# EAGLE board Spring2020V1.7 (EAGLE 9.5.1)
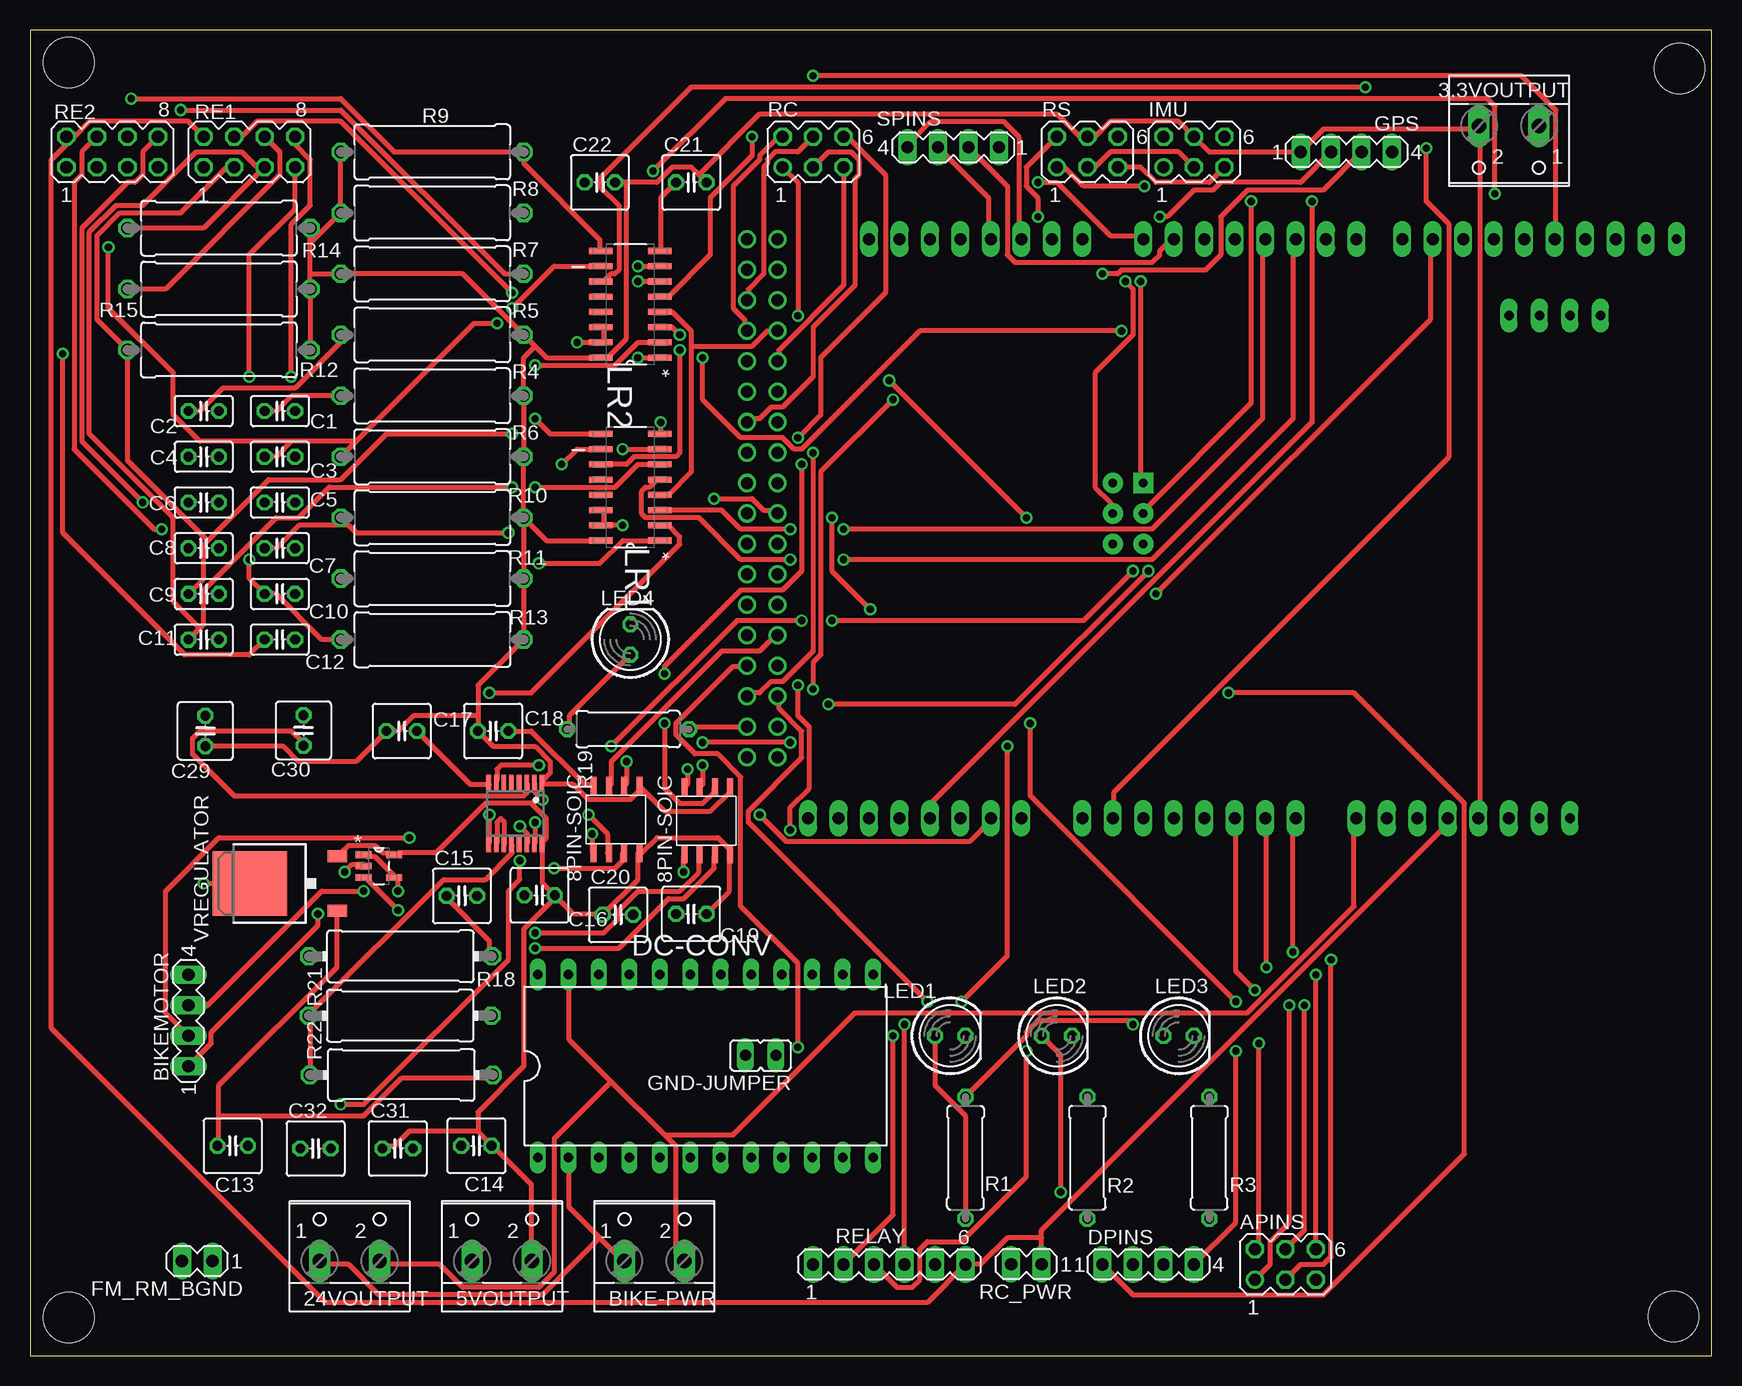
[diagram p0: board, top side]
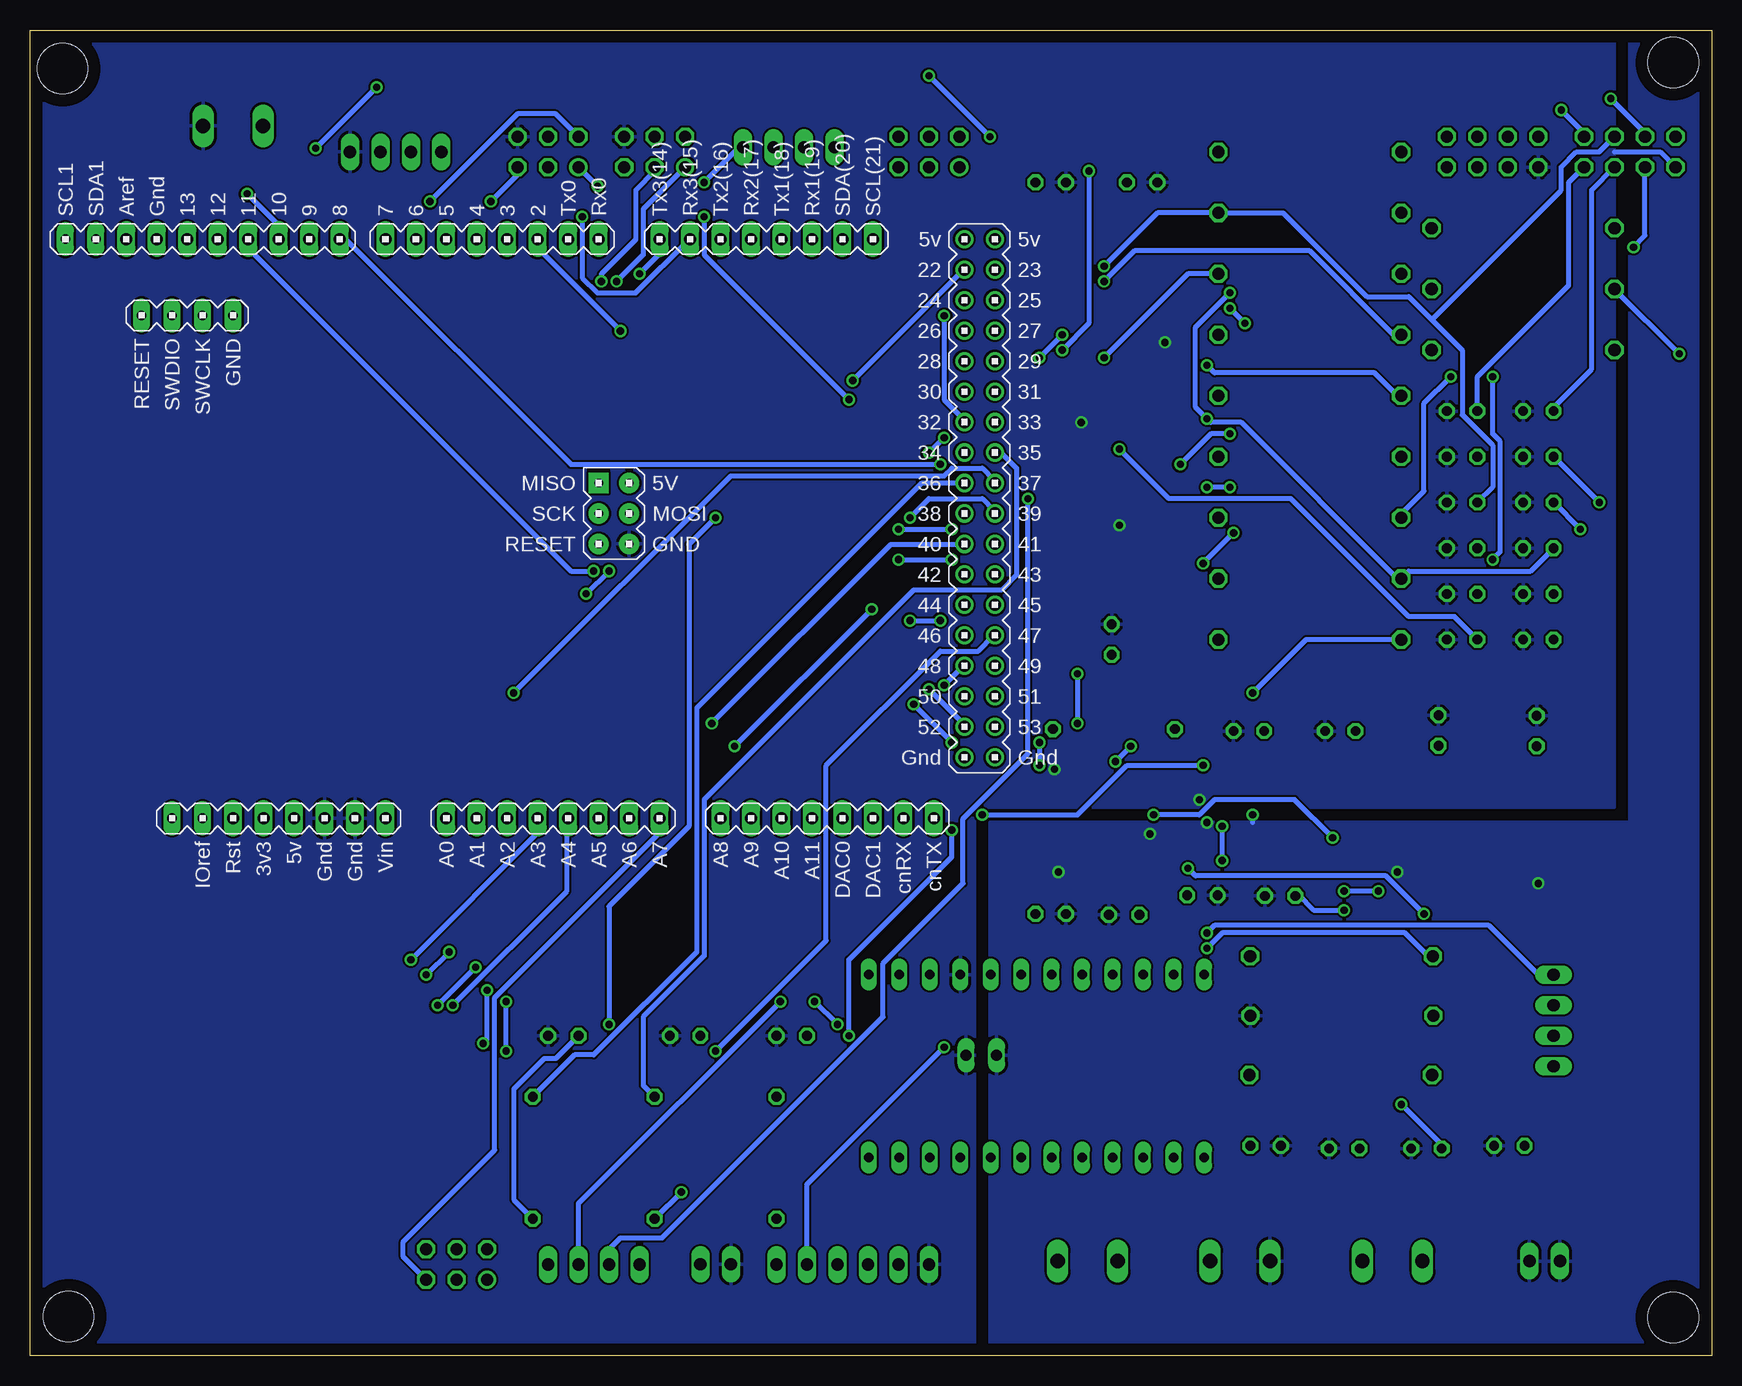
[diagram p1: board, bottom side, seen from below]

Size 140.21 x 110.49 mm. Coordinates in mm from the lower left corner, seen from the top.
Outline: 0,0 140.21,0 140.21,110.49 0,110.49 0,0
Copper layers (1*16): Top 0.035mm / dielectric 1.5mm / Bottom 0.035mm
Design rules "default *": minimum track width 10mil, minimum drill 0.6mm, track to track 7mil, track to pad 7mil, pad to pad 7mil, via to via 7mil, smd to smd 7mil, copper to edge 40mil, drill to drill 7mil, minimum pad ring 10mil, minimum via ring 8mil, stop-mask expansion 4mil, vias tented up to drill 0mil, thermal gap 10mil
Net classes: 0 default: width 0.406 mm
Holes 4.2 mm at 3.23,3.19 3.23,107.77 137.49,107.27 136.99,3.29

## Footprints (pad centres in the part's own frame; a part is rotated, then mirrored left to right if it is on the bottom)
W237-102 = drill 1.194 long: 1 -2.5,-1.27; 2 2.5,-1.27
MA03-2 = drill 1.016: 1 -2.54,-1.27 | drill 1.016 octagon: 2 -2.54,1.27; 3 0,-1.27; 4 0,1.27; 5 2.54,-1.27; 6 2.54,1.27
MA04-1 = drill 1.016 long: 1 -3.81,0; 2 -1.27,0; 3 1.27,0; 4 3.81,0
C025-025X050 = drill 0.813 octagon: 1 -1.27,0; 2 1.27,0
C025-050X050 = drill 0.813 octagon: 1 -1.27,0; 2 1.27,0
DIL24-6 = drill 0.813 long: 1 -13.97,-7.62; 2 -11.43,-7.62; 3 -8.89,-7.62; 4 -6.35,-7.62; 5 -3.81,-7.62; 6 -1.27,-7.62; 7 1.27,-7.62; 8 3.81,-7.62; 9 6.35,-7.62; 10 8.89,-7.62; 11 11.43,-7.62; 12 13.97,-7.62; 13 13.97,7.62; 14 11.43,7.62; 15 8.89,7.62; 16 6.35,7.62; 17 3.81,7.62; 18 1.27,7.62; 19 -1.27,7.62; 20 -3.81,7.62; 21 -6.35,7.62; 22 -8.89,7.62; 23 -11.43,7.62; 24 -13.97,7.62
MA02-1 = drill 1.016 long: 1 -2.54,0; 2 0,0
JP1 = drill 0.914 long: 1 0,-1.27; 2 0,1.27
LED5MM = drill 0.813 octagon: A -1.27,0; K 1.27,0
SOIC127P600X175-16N = smd 1.981 x 0.508: 1 -2.464,4.445; 2 -2.464,3.175; 3 -2.464,1.905; 4 -2.464,0.635; 5 -2.464,-0.635; 6 -2.464,-1.905; 7 -2.464,-3.175; 8 -2.464,-4.445; 9 2.464,-4.445; 10 2.464,-3.175; 11 2.464,-1.905; 12 2.464,-0.635; 13 2.464,0.635; 14 2.464,1.905; 15 2.464,3.175; 16 2.464,4.445
SOT95P280X145-5N = smd 1.321 x 0.559: 1 -1.27,0.94; 2 -1.27,0; 3 -1.27,-0.94; 4 1.27,-0.94; 5 1.27,0.94
0309/10 = drill 0.813 octagon: 1 -5.08,0; 2 5.08,0
P0613/15 = drill 1.016 octagon: 1 -7.62,0; 2 7.62,0
0414/15 = drill 1.016 octagon: 1 -7.62,0; 2 7.62,0
MA04-2 = drill 1.016 octagon: 1 -3.81,-1.27; 2 -3.81,1.27; 3 -1.27,-1.27; 4 -1.27,1.27; 5 1.27,-1.27; 6 1.27,1.27; 7 3.81,-1.27; 8 3.81,1.27
MA06-1 = drill 1.016 long: 1 -6.35,0; 2 -3.81,0; 3 -1.27,0; 4 1.27,0; 5 3.81,0; 6 6.35,0
DUE(NORMAL) = drill 1 long: 2 -16.51,30.48; 3 -19.05,30.48; 3V3 -39.37,-17.78; 4 -21.59,30.48; 5 -24.13,30.48; 5V -36.83,-17.78; 6 -26.67,30.48; 7 -29.21,30.48; 8 -33.02,30.48; 9 -35.56,30.48; 10 -38.1,30.48; 11 -40.64,30.48; 12 -43.18,30.48; 13 -45.72,30.48; A0 -24.13,-17.78; A1 -21.59,-17.78; A2 -19.05,-17.78; A3 -16.51,-17.78; A4 -13.97,-17.78; A5 -11.43,-17.78; A6 -8.89,-17.78; A7 -6.35,-17.78; A8 -1.27,-17.78; A9 1.27,-17.78; A10 3.81,-17.78; A11 6.35,-17.78; AREF -50.8,30.48; AREF1 -50.8,30.48; CANRX 13.97,-17.78; CANTX 16.51,-17.78; DAC0 8.89,-17.78; DAC1 11.43,-17.78; GND1 -48.26,30.48; GND_1 -34.29,-17.78; GND_2 -31.75,-17.78; RESET -41.91,-17.78; RX0 -11.43,30.48; RX1 6.35,30.48; RX2 1.27,30.48; RX3 -3.81,30.48; SCL 11.43,30.48; SDA 8.89,30.48; TX0 -13.97,30.48; TX1 3.81,30.48; TX2 -1.27,30.48; TX3 -6.35,30.48; VIN -29.21,-17.78 | drill 1: 5V_A 19.05,30.48; 5V_B 21.59,30.48; 22 19.05,27.94; 23 21.59,27.94; 24 19.05,25.4; 25 21.59,25.4; 26 19.05,22.86; 27 21.59,22.86; 28 19.05,20.32; 29 21.59,20.32; 30 19.05,17.78; 31 21.59,17.78; 32 19.05,15.24; 33 21.59,15.24; 34 19.05,12.7; 35 21.59,12.7; 36 19.05,10.16; 37 21.59,10.16; 38 19.05,7.62; 39 21.59,7.62; 40 19.05,5.08; 41 21.59,5.08; 42 19.05,2.54; 43 21.59,2.54; 44 19.05,0; 45 21.59,0; 46 19.05,-2.54; 47 21.59,-2.54; 48 19.05,-5.08; 49 21.59,-5.08; 50 19.05,-7.62; 51 21.59,-7.62; 52 19.05,-10.16; 53 21.59,-10.16; GND_A 19.05,-12.7; GND_B 21.59,-12.7 | drill 0.7 pad 1.676: 5V_ICSP -8.89,5.08; GND_ICSP -8.89,10.16; MOSI_ICSP -8.89,7.62; RESET_ICSP -11.43,5.08; SCK_ICSP -11.43,7.62 | drill 0.8 pad 1.422 long: GND_DEBUG -41.91,24.13; IOREF -44.45,-17.78; NC -46.99,-17.78; RESET_DEBUG -49.53,24.13; SCL1 -55.88,30.48; SDA1 -53.34,30.48; SWCLK_DEBUG -44.45,24.13; SWDIO_DEBUG -46.99,24.13 | drill 0.7 pad 1.676 square: MISO_ICSP -11.43,10.16
8PINSOIC = smd 1.524 x 0.508: 1 -2.794,2.286; 2 -2.794,1.016; 3 -2.794,-0.254; 4 -2.794,-1.524; 5 2.794,-1.524; 6 2.794,-0.254; 7 2.794,1.016; 8 2.794,2.286
QSOP16 = smd 0.381 x 1.27: 1 -2.223,-2.6; 2 -1.587,-2.6; 3 -0.953,-2.6; 4 -0.318,-2.6; 5 0.318,-2.6; 6 0.953,-2.6; 7 1.587,-2.6; 8 2.223,-2.6; 9 2.223,2.6; 10 1.587,2.6; 11 0.953,2.6; 12 0.318,2.6; 13 -0.318,2.6; 14 -0.953,2.6; 15 -1.587,2.6; 16 -2.223,2.6
TO252 = smd 1 x 1.6: 1 -2.28,-4.8; 2 2.28,-4.8 | smd 5.4 x 6.2: 3 0,2.5

## Placement (x,y rotation side)
3.3VOUTPUT  [W237-102]  123.29,101.23 180 top
5VOUTPUT  [W237-102]  39.34,9.17 0 top
24VOUTPUT  [W237-102]  26.64,9.17 0 top
APINS  [MA03-2]  104.65,7.62 0 top
BIKE-PWR  [W237-102]  52.04,9.17 0 top
BIKEMOTOR  [MA04-1]  13.21,27.94 90 top
C1  [C025-025X050]  20.83,78.74 0 top
C2  [C025-025X050]  14.48,78.74 0 top
C3  [C025-025X050]  20.83,74.93 0 top
C4  [C025-025X050]  14.48,74.93 0 top
C5  [C025-025X050]  20.83,71.12 0 top
C6  [C025-025X050]  14.48,71.12 0 top
C7  [C025-025X050]  20.83,67.31 0 top
C8  [C025-025X050]  14.48,67.31 0 top
C9  [C025-025X050]  14.48,63.5 0 top
C10  [C025-025X050]  20.83,63.5 0 top
C11  [C025-025X050]  14.48,59.69 0 top
C12  [C025-025X050]  20.83,59.69 0 top
C13  [C025-050X050]  16.89,17.5 0 top
C14  [C025-050X050]  37.21,17.5 180 top
C15  [C025-050X050]  36,38.33 0 top
C16  [C025-050X050]  42.48,38.38 180 top
C17  [C025-050X050]  30.99,52.07 0 top
C18  [C025-050X050]  38.61,52.07 0 top
C19  [C025-050X050]  55.12,36.83 180 top
C20  [C025-050X050]  49.01,36.76 0 top
C21  [C025-050X050]  55.12,97.79 0 top
C22  [C025-050X050]  47.5,97.79 0 top
C29  [C025-050X050]  14.62,52.08 90 top
C30  [C025-050X050]  22.8,52.12 90 top
C31  [C025-050X050]  30.65,17.28 0 top
C32  [C025-050X050]  23.8,17.28 0 top
DC-CONV  [DIL24-6]  56.31,24.16 0 top
DPINS  [MA04-1]  93.22,7.62 0 top
FM_RM_BGND  MA02-1  [MA02-1]  12.67,7.9 180 top
GND-JUMPER  [JP1]  60.91,25.05 90 top
GPS  [MA04-1]  109.73,100.33 0 top
IMU  [MA03-2]  97.03,100.33 0 top
LED1  [LED5MM]  76.71,26.67 0 top
LED2  [LED5MM]  85.6,26.67 0 top
LED3  [LED5MM]  95.76,26.67 0 top
LED4  [LED5MM]  50.04,59.69 90 top
LR1  ST26C32ABDR  [SOIC127P600X175-16N]  50.04,72.39 180 top
LR2  ST26C32ABDR  [SOIC127P600X175-16N]  50.04,87.63 180 top
OP-AMP  OPAMP  [SOT95P280X145-5N]  29.09,40.81 0 top
R1  [0309/10]  77.98,16.51 270 top
R2  [0309/10]  88.14,16.51 270 top
R3  [0309/10]  98.3,16.51 270 top
R4  [P0613/15]  33.53,80.01 0 top
R5  [P0613/15]  33.53,85.09 0 top
R6  [P0613/15]  33.53,74.93 0 top
R7  [P0613/15]  33.53,90.17 0 top
R8  [P0613/15]  33.53,95.25 0 top
R9  [P0613/15]  33.53,100.33 0 top
R10  [P0613/15]  33.53,69.85 180 top
R11  [P0613/15]  33.53,64.77 180 top
R12  [P0613/15]  15.75,83.82 180 top
R13  [P0613/15]  33.53,59.69 180 top
R14  [P0613/15]  15.75,93.98 180 top
R15  [P0613/15]  15.75,88.9 180 top
R18  [0414/15]  30.88,33.3 0 top
R19  [0309/10]  49.86,52.23 180 top
R21  [0414/15]  30.85,28.35 180 top
R22  [0414/15]  30.95,23.41 0 top
RC  [MA03-2]  65.28,100.33 0 top
RC_PWR  MA02-1  [MA02-1]  81.79,7.64 180 top
RE1  [MA04-2]  18.29,100.33 0 top
RE2  [MA04-2]  6.86,100.33 0 top
RELAY  [MA06-1]  71.63,7.62 0 top
RS  [MA03-2]  88.14,100.33 0 top
SPINS  [MA04-1]  76.96,100.71 180 top
U$1  DUE(NORMAL)  [DUE(NORMAL)]  81.37,62.58 0 bottom
U$2  IL-711  [8PINSOIC]  48.51,44.7 270 top
U$5  ISOLATED_ERROR_AMP_ADUM3190  [QSOP16]  40.45,45.21 180 top
U$7  IL-712  [8PINSOIC]  56.07,44.59 270 top
VREGULATOR  7818DT  [TO252]  20.83,39.37 90 top

## Library data of the parts
3.3VOUTPUT 5VOUTPUT 24VOUTPUT BIKE-PWR = con-wago-500; MPN: 237-102; OC_FARNELL: unknown; OC_NEWARK: 70K9898
APINS BIKEMOTOR DPINS GPS IMU RC RE1 RE2 RELAY RS SPINS = con-lstb
C1-C22 C29-C32 R4-R15 R18 R21 R22 = resistor
DC-CONV = Spring2016DC_DC_Conv
FM_RM_BGND RC_PWR = divers
GND-JUMPER = jumper
LED1-LED4 = led
LR1 LR2 = BikeTeamLR; MPN: ST26C32ABDR; OC_FARNELL: -; OC_NEWARK: 89K0998; PACKAGE: SOIC-16; SUPPLIER: STMICROELECTRONICS
OP-AMP = Spring2016opamp
R1-R3 R19 = rcl
U$1 = DUElib130425
U$2 U$7 = Spring2016Optoisolator
U$5 = Spring2016IsolatedErrorAmp
VREGULATOR = linear

## Nets
1AIN1: C7.1 LR1.1 R10.2 RE1.8
1AIN2: C10.1 LR1.2 R13.2 RE1.7
1AOUT: LR1.3 U$1.4
1BIN1: C12.1 LR1.7 R15.2 RE1.6
1BIN2: C11.1 LR1.6 R14.2 RE1.5
1BOUT: LR1.5 U$1.5
1CIN1: C8.1 LR1.9 R11.2 RE1.4
1CIN2: C9.1 LR1.10 R12.2 RE1.3
1COUT: LR1.11 U$1.10
2AIN1: C4.1 LR2.1 R7.2 RE2.8
2AIN2: C1.1 LR2.2 R4.1 RE2.7
2AOUT: LR2.3 U$1.2
2BIN1: C5.1 LR2.7 R8.2 RE2.6
2BIN2: C2.1 LR2.6 R5.1 RE2.5
2BOUT: LR2.5 U$1.13
2CIN1: C6.1 LR2.9 R9.2 RE2.4
2CIN2: C3.1 LR2.10 R6.1 RE2.3
2COUT: LR2.11 U$1.A6
3.3V: 3.3VOUTPUT.2 C17.1 C18.1 C21.2 C22.2 C29.1 GPS.1 IMU.4 LR1.16 LR2.16 R4.2 R5.2 R6.2 R7.1 R8.1 R9.1 R10.1 R11.1 R12.1 R13.1 R14.1 R15.1 RS.4 U$1.3V3 U$2.1 U$5.1 U$7.1
5V: RC_PWR.1 RE1.2 RE2.2 RELAY.6 U$1.5V
22: R1.1 U$1.22
24GND: 24VOUTPUT.1 BIKE-PWR.1 DC-CONV.2
29: U$1.29
35: R2.1 U$1.35
36: R3.1 U$1.36
37: DPINS.1 U$1.37
38: DPINS.2 U$1.38
39: DPINS.3 U$1.39
40: DPINS.4 U$1.40
47: RELAY.3 U$1.47
48: RELAY.2 U$1.48
49: RELAY.5 U$1.49
50: RELAY.4 U$1.50
53: R19.1 U$1.53
A0: APINS.6 U$1.A0
A1: APINS.4 U$1.A1
A2: APINS.2 U$1.A2
A3: APINS.3 U$1.A3
A4: APINS.1 U$1.A4
A7: APINS.5 U$1.A7
BAT+: C13.1 R22.2 VREGULATOR.1
BGND: 5VOUTPUT.1 C13.2 C14.2 C15.2 C16.2 C19.2 C20.2 C31.2 C32.2 FM_RM_BGND.1 FM_RM_BGND.2 GND-JUMPER.2 OP-AMP.2 R21.1 U$2.5 U$5.9 U$5.15 U$7.5 VREGULATOR.3
BIKE-IN: 24VOUTPUT.2 BIKE-PWR.2 DC-CONV.23 U$1.VIN
BRAKE: RC.5 U$1.28
CH1: RC.6 U$1.51
CH2: RC.4 U$1.25
CURRENT_SENSE: U$1.A8
EAOUT: U$1.A9 U$5.7
FRONT-DIGI: U$1.46 U$2.3
FRONT-DIGIOUT: BIKEMOTOR.2 U$2.6
FRONT-PWM: U$1.9 U$2.2
FRONT-PWMOUT/SERVO1: BIKEMOTOR.1 U$2.7
GND: 3.3VOUTPUT.1 C1.2 C2.2 C3.2 C4.2 C5.2 C6.2 C7.2 C8.2 C9.2 C10.2 C11.2 C12.2 C17.2 C18.2 C21.1 C22.1 C29.2 C30.2 DC-CONV.16 GND-JUMPER.1 GPS.4 IMU.6 LED1.K LED2.K LED3.K LED4.K LR1.8 LR1.14 LR1.15 LR2.8 LR2.14 LR2.15 RC_PWR.2 RE1.1 RE2.1 RELAY.1 RS.6 U$1.5V_ICSP U$1.GND_1 U$1.GND_2 U$2.4 U$5.2 U$5.8 U$7.4
HORN: RC.1 U$1.32
IMU-CS: IMU.2 U$1.A11
LR-EN: LR1.4 LR2.4 U$1.26
MISO: IMU.3 RS.3 U$1.MISO_ICSP
MOSI: IMU.1 RS.1 U$1.MOSI_ICSP
N$1: LED1.A R1.2
N$2: LED2.A R2.2
N$3: LED3.A R3.2
N$6: LED4.A R19.2
N$7: C32.1 U$5.14
N$9: U$5.10 U$5.11
N$10: R21.2 R22.1 U$5.12
N$11: C30.1 U$5.3
PANIC: RC.2 U$1.27
REAR-PWM: U$1.8 U$7.2
REAR-PWM-FINAL: BIKEMOTOR.3 OP-AMP.1 OP-AMP.4
REAR-PWMOUT: C15.1 OP-AMP.3 R18.2
REAR-PWMR/SERVO2: R18.1 U$7.7
REAR-TIMER: BIKEMOTOR.4 U$7.6
REAR-TIMER-IN: U$1.11 U$7.3
REG5V: 5VOUTPUT.2 C14.1 C16.1 C19.1 C20.1 C31.1 OP-AMP.5 U$2.8 U$5.16 U$7.8 VREGULATOR.2
REV: RC.3 U$1.33
RS-CS: RS.2 U$1.52
RX0: SPINS.1 U$1.RX0
RX2: SPINS.3 U$1.RX2
RX3: GPS.2 U$1.RX3
SCK: IMU.5 RS.5 U$1.SCK_ICSP
TX0: SPINS.2 U$1.TX0
TX2: SPINS.4 U$1.TX2
TX3: GPS.3 U$1.TX3

## Tracks (layer width: path | path; a pad name or v marks a point on that pad's centre or on a via)
1AIN1  (via drill 0.6)
  Top 0.406: LR1.1 49.4,67.94 47.5,66.04 v42.42,66.04 | v39.88,68.58 27.18,68.58 26.54,69.22 | R10.2 26.54,69.22 | C7.1 20.51,67.31 22.42,69.22 26.54,69.22 | RE1.8 22.1,100.96 23.37,99.69 23.37,95.88 21.78,94.3 v21.78,81.6
  Bottom 0.406: v39.88,68.58 v42.42,66.04 | v21.78,81.6 24,79.38 24,72.07 25.91,70.17 R10.2
1AIN2  (via drill 0.6)
  Top 0.406: LR1.2 53.21,69.22 54.17,68.26 54.17,67.63 41.78,55.25 v38.29,55.25 | R13.2 24.32,59.69 20.51,63.5 C10.1 18.29,64.77 v18.29,66.36 | RE1.7 22.1,95.57 18.29,91.76 v18.29,81.6
  Bottom 0.406: v38.29,55.25 33.85,59.69 R13.2 | v18.29,81.6 18.29,76.83 17.65,76.2 17.65,66.99 v18.29,66.36
1AOUT  (via drill 0.6)
  Top 0.406: LR1.3 57.66,70.48 59.25,68.9 v63.37,68.9 | v67.82,68.9 93.53,68.9 102.74,78.1 102.74,93.03 U$1.4
  Bottom 0.406: v67.82,68.9 v63.37,68.9
1BIN1  (via drill 0.6)
  Top 0.406: R15.2 11.3,88.9 20.83,98.42 20.83,100.33 RE1.6 | v49.4,75.56 LR1.7 | v2.73,83.5 2.73,68.58 12.89,58.42 18.29,58.42 C12.1
  Bottom 0.406: v49.4,75.56 45.28,71.44 35.12,71.44 25.27,61.59 21.46,61.59 C12.1 | v2.73,83.5 R15.2
1BIN2  (via drill 0.6)
  Top 0.406: R14.2 14.48,93.98 19.24,98.74 | LR1.6 50.67,74.29 48.77,72.39 v42.1,72.39 | v40.2,72.39 24.96,72.39 22.42,69.85 20.51,69.85 14.48,63.82 14.48,60.96 14.16,60.64 | C11.1 14.16,60.64 | 19.24,98.74 17.65,100.33 13.84,100.33 9.4,95.88 7.18,95.88 4.95,93.66 4.95,76.83 11.94,69.85 11.94,62.87 14.16,60.64 | 19.24,98.74 RE1.5
  Bottom 0.406: v40.2,72.39 v42.1,72.39
1BOUT  (via drill 0.6)
  Top 0.406: v63.37,66.36 59.25,66.36 55.75,69.85 51.31,69.85 50.99,70.17 50.99,72.07 51.31,72.39 51.62,72.39 52.26,73.02 LR1.5 | v67.82,66.36 93.53,66.36 105.28,78.1 105.28,93.03 U$1.5
  Bottom 0.406: v67.82,66.36 v63.37,66.36
1CIN1  (via drill 0.6)
  Top 0.406: LR1.9 43.37,76.83 v42.1,78.1 | RE1.4 17.65,101.6 18.92,102.87 25.91,102.87 v40.2,88.58
  Bottom 0.406: C8.1 15.11,65.41 25.27,65.41 R11.2 26.23,64.77 39.24,77.79 41.78,77.79 v42.1,78.1 43.05,79.06 43.05,85.72 v40.2,88.58
1CIN2  (via drill 0.6)
  Top 0.406: LR1.10 45.59,75.56 v44.32,74.29 | v40.2,76.83 29.72,76.83 25.91,73.02 19.88,73.02 14.8,67.94 | 14.8,67.94 14.48,67.63 14.48,64.77 C9.1 | 14.8,67.94 8.13,74.61 R12.2 5.59,86.36 5.59,93.34 7.49,95.25 12.57,95.25 16.38,99.06 RE1.3
  Bottom 0.406: v44.32,74.29 41.78,76.83 v40.2,76.83
1COUT  (via drill 0.6)
  Top 0.406: LR1.11 49.72,74.29 50.36,74.93 53.85,74.93 54.17,75.25 v54.17,83.82 | v51.94,98.74 57.98,104.77 121.47,104.77 122.11,104.14 v122.11,96.84
  Bottom 0.406: v54.17,83.82 51.94,86.04 v51.94,98.74 | v122.11,96.84 119.57,94.3 119.57,93.34 U$1.10
2AIN1  (via drill 0.6)
  Top 0.406: v50.67,83.18 LR2.1 | v9.4,71.12 4.32,76.2 4.32,93.98 8.13,97.79 8.76,97.79 9.4,98.42 9.4,100.33 RE2.8 | R7.2 39.56,90.17 25.91,103.82 v12.57,103.82
  Bottom 0.406: v50.67,83.18 43.69,90.17 R7.2 | v9.4,71.12 C4.1 | v12.57,103.82 10.67,101.92 RE2.8
2AIN2  (via drill 0.6)
  Top 0.406: LR2.2 50.67,84.45 48.77,82.55 v42.1,82.55 | C1.1 20.51,78.74 21.78,80.01 R4.1
  Bottom 0.406: v42.1,82.55 41.47,81.91 28.13,81.91 26.23,80.01 R4.1 | RE2.7 11.94,97.79 11.94,89.22 19.56,81.6 C1.1
2AOUT  (via drill 0.6)
  Top 0.406: LR2.3 53.53,85.72 v54.17,85.09 | v56.07,83.18 56.07,79.69 59.25,76.52 62.74,76.52 63.69,75.56 64.32,75.56 74.17,85.41 v91,85.41
  Bottom 0.406: v56.07,83.18 v54.17,85.09 | v91,85.41 97.66,92.07 97.66,93.03 U$1.2
2BIN1  (via drill 0.6)
  Top 0.406: v50.67,90.8 LR2.7
  Bottom 0.406: v50.67,90.8 46.23,95.25 R8.2 35.75,95.25 28.77,88.27 25.27,88.27 23.37,86.36 | C5.1 18.29,72.39 18.29,75.88 20.83,78.42 20.83,83.82 23.37,86.36 | RE2.6 9.4,100.33 11.3,100.33 12.57,99.06 12.57,97.16 23.37,86.36
2BIN2  (via drill 0.6)
  Top 0.406: v50.67,89.53 LR2.6 | C2.1 14.16,78.74 16.07,80.64 22.1,80.64 25.91,84.45 R5.1
  Bottom 0.406: v50.67,89.53 48.13,92.07 33.53,92.07 26.54,85.09 R5.1 | RE2.5 10.03,97.16 10.03,82.23 13.21,79.06 C2.1
2BOUT  (via drill 0.6)
  Top 0.406: LR2.5 53.21,88.27 56.71,91.76 56.71,96.52 60.2,100.01 v60.2,101.6 | v65.28,106.68 124.33,106.68 127.19,103.82 127.19,93.34 U$1.13
  Bottom 0.406: v65.28,106.68 v60.2,101.6
2CIN1  (via drill 0.6)
  Top 0.406: LR2.9 47.5,92.07 47.5,93.03 41.15,99.38 R9.2 30.35,100.33 25.91,104.77 v8.45,104.77 | v10.99,68.9 10.35,68.9 3.68,75.56 3.68,97.79 4.32,98.42 4.32,100.33 RE2.4
  Bottom 0.406: v10.99,68.9 C6.1 | v8.45,104.77 5.59,101.92 RE2.4
2CIN2  (via drill 0.6)
  Top 0.406: LR2.10 43.69,90.8 v40.2,87.31 | v38.93,86.04 37.02,86.04 27.18,76.2 | R6.1 27.18,76.2 | C3.1 20.51,74.93 21.78,76.2 | 27.18,76.2 21.78,76.2 | v6.54,92.39 6.54,87.31 11.94,81.91 11.94,78.42 14.16,76.2 21.78,76.2
  Bottom 0.406: v38.93,86.04 v40.2,87.31 | RE2.3 5.59,93.34 v6.54,92.39
2COUT  (via drill 0.6)
  Top 0.406: v111.31,105.73 55.12,105.73 47.5,98.11 47.5,97.47 49.09,95.88 49.09,90.49 48.77,90.17 48.45,90.17 47.82,89.53 LR2.11 | v116.4,100.65 116.4,96.2 118.3,94.3 118.3,74.93 90.36,46.99 90.36,45.09 U$1.A6
  Bottom 0.406: v116.4,100.65 v111.31,105.73
3.3V
  Top 0.406: U$1.3V3 120.84,45.09 120.84,102.23 3.3VOUTPUT.2 120.52,102.23 107.82,102.23 GPS.1 98.3,100.33 IMU.4 95.76,102.87 90.04,102.87 88.77,101.6 RS.4 87.5,101.6 85.6,103.5 60.83,103.5 55.75,98.42 | R12.1 R15.1 23.37,90.17 | 23.37,90.17 23.37,92.71 | 23.37,92.71 R14.1 | 23.37,90.17 R7.1 36.07,90.17 R5.2 42.1,84.14 | 23.37,92.71 R8.1 R9.1 | 49.72,97.79 52.26,97.79 53.53,99.06 55.12,99.06 55.75,98.42 | 49.72,97.79 C22.2 | C21.2 55.75,98.42 | 42.1,84.14 43.05,83.18 LR2.16 48.13,83.18 49.72,84.77 49.72,97.79 | C29.1 14.8,50.8 21.14,50.8 22.42,49.53 27.18,49.53 C17.1 30.67,52.07 31.94,53.34 37.34,53.34 | 50.99,47.31 50.04,46.36 46.54,46.36 45.28,47.62 42.73,47.62 U$5.1 42.73,47.94 43.37,48.58 43.37,49.53 42.1,50.8 38.61,50.8 C18.1 37.34,53.34 | 50.99,47.31 52.9,45.4 56.71,45.4 58.29,46.99 58.29,47.31 U$7.1 | 50.99,47.31 U$2.1 | 37.34,53.34 37.34,55.88 R13.1 R11.1 R10.1 | LR1.16 43.05,67.94 R10.1 | R10.1 R6.2 R4.2 41.15,83.18 42.1,84.14
5V
  Top 0.406: RE1.2 13.21,102.87 4.95,102.87 3.68,101.6 RE2.2 3.05,100.96 1.78,99.69 1.78,27.3 24.64,4.44 74.8,4.44 RELAY.6 79.25,7.62 81.47,9.84 84.33,9.84 | RC_PWR.1 84.33,9.84 | 84.33,9.84 84.33,10.48 117.98,44.13 117.98,44.77 U$1.5V
22  (via drill 0.6)
  Top 0.406: R1.1 83.06,26.67 83.06,26.99 84.01,27.94 91.63,27.94 v91.95,27.62 | v71.63,81.28 v83.06,69.85
  Bottom 0.406: v91.95,27.62 91.95,37.46 85.28,44.13 85.28,67.63 v83.06,69.85 | v71.63,81.28 62.42,90.49 U$1.22
24GND
  Top 0.406: 47.5,9.84 49.4,7.94 BIKE-PWR.1 | 47.5,9.84 44.96,12.38 44.96,16.51 DC-CONV.2 | 47.5,9.84 42.73,5.08 29.08,5.08 26.54,7.62 24.32,7.62 24VOUTPUT.1
35
  Bottom 0.406: R2.1 89.09,22.54 89.09,28.26 84.01,33.34 84.01,46.36 66.55,63.82 59.25,63.82 57.98,65.09 57.98,73.98 59.56,75.56 U$1.35
36
  Bottom 0.406: R3.1 94.81,25.08 93.22,25.08 84.65,33.66 84.65,53.98 65.91,72.71 62.42,72.71 U$1.36
37  (via drill 0.6)
  Top 0.406: v99.88,55.25 110.36,55.25 119.57,46.04 119.57,16.83 107.82,5.08 91.95,5.08 DPINS.1
  Bottom 0.406: v99.88,55.25 81.79,73.34 64.01,73.34 63.37,73.98 60.83,73.98 59.88,73.02 U$1.37
38  (via drill 0.6)
  Top 0.406: v57.02,71.44 60.2,71.44 61.15,70.48 62.1,70.48 U$1.38
  Bottom 0.406: v57.02,71.44 57.02,50.16 62.42,44.77 62.42,39.37 69.09,32.7 69.09,28.26 87.5,9.84 91,9.84 91.95,8.89 DPINS.2
39  (via drill 0.6)
  Top 0.406: v66.87,69.85 66.87,65.41 v70.04,62.23 | v81.47,50.8 81.47,33.34 v77.66,29.53
  Bottom 0.406: v66.87,69.85 65.28,71.44 60.83,71.44 59.88,70.48 U$1.39 | v81.47,50.8 v70.04,62.23 | v77.66,29.53 94.49,12.7 DPINS.3
40  (via drill 0.6)
  Top 0.406: v83.38,52.7 83.38,46.67 v100.52,29.53 | v100.52,25.4 100.52,11.11 DPINS.4
  Bottom 0.406: v83.38,52.7 68.45,67.63 62.42,67.63 U$1.40 | v100.52,25.4 v100.52,29.53
47  (via drill 0.6)
  Top 0.406: v83.06,25.4 83.06,14.92 77.66,9.52 74.8,9.52 74.17,8.89 74.17,6.35 73.53,5.71 72.26,5.71 RELAY.3
  Bottom 0.406: v83.06,25.4 73.85,34.61 73.85,49.21 64.32,58.74 61.15,58.74 59.88,60.01 U$1.47
48  (via drill 0.6)
  Top 0.406: v64.01,55.88 64.01,53.34 64.96,52.39 64.96,47.31 63.37,45.72 v63.37,43.82 | v71.95,26.67 71.95,11.75 RELAY.2
  Bottom 0.406: v64.01,55.88 62.42,57.47 U$1.48 | v63.37,43.82 63.37,41.59 71.95,33.02 v71.95,26.67
49  (via drill 0.6)
  Top 0.406: v64.01,25.72 64.01,32.7 59.25,37.46 59.25,48.26 57.34,50.16 55.43,50.16 53.85,51.75 53.85,52.7 58.61,57.47 59.56,57.47 U$1.49
  Bottom 0.406: v64.01,25.72 75.44,14.29 RELAY.5
50  (via drill 0.6)
  Top 0.406: v74.8,29.53 59.88,44.45 59.88,45.4 64.32,49.85 64.32,52.07 62.42,53.98 62.42,54.93 U$1.50 | RELAY.4 v72.9,27.62
  Bottom 0.406: v72.9,27.62 v74.8,29.53
53
  Top 0.406: R19.1 55.12,52.39 59.56,52.39 U$1.53
A0  (via drill 0.6)
  Top 0.406: v105.28,33.66 105.28,44.77 U$1.A0 | APINS.6 v107.19,31.75
  Bottom 0.406: v107.19,31.75 v105.28,33.66
A1  (via drill 0.6)
  Top 0.406: v103.06,32.38 103.06,44.77 U$1.A1 | v106.24,29.21 106.24,10.48 APINS.4
  Bottom 0.406: v106.24,29.21 v103.06,32.38
A2  (via drill 0.6)
  Top 0.406: v102.11,30.48 100.52,32.07 100.52,44.77 U$1.A2 | v102.43,26.03 102.43,9.21 APINS.2
  Bottom 0.406: v102.11,30.48 102.11,26.35 v102.43,26.03
A3  (via drill 0.6)
  Top 0.406: v108.46,33.02 108.46,8.25 107.82,7.62 105.92,7.62 APINS.3
  Bottom 0.406: v108.46,33.02 97.98,43.5 97.98,44.77 U$1.A3
A4  (via drill 0.6)
  Top 0.406: v104.97,29.21 104.97,11.11 103.38,9.52 103.38,7.62 APINS.1
  Bottom 0.406: v104.97,29.21 95.44,38.73 95.44,44.77 U$1.A4
A7
  Bottom 0.406: APINS.5 109.09,8.25 109.09,9.52 101.47,17.14 101.47,29.84 87.82,43.5 87.82,44.77 U$1.A7
BAT+
  Top 0.406: 15.75,20 15.75,17.78 C13.1 | 15.75,20 15.75,22.54 25.59,32.38 25.59,36.83 VREGULATOR.1 | 15.75,20 27.81,20 30.99,23.18 38.29,23.18 R22.2
BGND  (via drill 0.6)
  Top 0.406: v38.29,45.09 38.29,42.86 U$5.9 | v42.1,44.45 42.1,42.86 U$5.15 | v26.23,40.32 26.86,40.96 27.81,40.96 OP-AMP.2 | v46.86,43.5 46.86,41.91 U$2.5 | v54.48,40.32 54.48,41.59 U$7.5 | v14.48,39.37 VREGULATOR.3
  Bottom 0.406: 38.29,44.45 v38.29,45.09
  pour Bottom: 0.11,110.59 6.86,110.56 6.86,44.45 60.2,44.45 60.2,0.03 0.11,0.1
BIKE-IN
  Top 0.406: 52.9,18.41 53.85,17.46 53.85,8.57 54.48,7.94 BIKE-PWR.2 | 52.9,18.41 48.45,22.86 | 48.45,22.86 44.96,26.35 44.96,31.75 DC-CONV.23 | 52.9,18.41 58.61,18.41 68.77,28.58 101.47,28.58 110.36,37.46 110.36,44.77 U$1.VIN | 48.45,22.86 43.69,18.1 43.69,6.98 42.42,5.71 36.07,5.71 34.16,7.62 29.4,7.62 24VOUTPUT.2
BRAKE
  Top 0.406: RC.5 67.82,89.22 62.42,83.82 62.42,83.18 U$1.28
CH1  (via drill 0.6)
  Top 0.406: v65.28,75.25 65.28,58.74 62.74,56.2 61.79,56.2 60.83,55.25 59.88,55.25 U$1.51 | v64.01,76.52 65.91,78.42 65.91,83.18 71.31,88.58 71.31,98.42 68.14,101.6 RC.6
  Bottom 0.406: v64.01,76.52 v65.28,75.25
CH2
  Top 0.406: RC.4 64.01,100.33 62.1,100.33 61.47,99.69 61.47,99.38 61.15,99.06 61.15,90.17 59.88,88.9 59.88,88.27 U$1.25
EAOUT  (via drill 0.6)
  Top 0.406: v42.42,49.21 39.24,49.21 38.93,48.9 38.93,47.94 U$5.7 | v60.83,45.09 63.06,42.86 78.29,42.86 80.2,44.77 U$1.A9
  Bottom 0.406: v42.42,49.21 48.77,49.21 52.9,45.09 v60.83,45.09
FRONT-DIGI
  Top 0.406: U$2.3 48.45,47.62 48.45,49.53 57.66,58.74 60.83,58.74 62.1,60.01 U$1.46
FRONT-DIGIOUT  (via drill 0.6)
  Top 0.406: v46.54,45.09 48.13,43.5 48.13,41.91 U$2.6 | v31.62,43.18 15.75,43.18 11.3,38.73 11.3,28.58 BIKEMOTOR.2
  Bottom 0.406: v46.54,45.09 42.73,45.09 41.47,46.36 34.8,46.36 v31.62,43.18
FRONT-PWM  (via drill 0.6)
  Top 0.406: v49.72,49.53 49.72,47.62 U$2.2 | v48.45,50.8 58.93,61.28 v64.32,61.28 | v66.87,61.28 87.82,61.28 v91.95,65.41 | v93.85,63.5 116.71,86.36 116.71,93.03 U$1.9
  Bottom 0.406: v48.45,50.8 v49.72,49.53 | v66.87,61.28 v64.32,61.28 | v93.85,63.5 v91.95,65.41
FRONT-PWMOUT/SERVO1  (via drill 0.6)
  Top 0.406: v43.69,40.64 48.77,40.64 49.4,41.27 49.4,41.91 U$2.7 | v24,36.83 24,35.88 15.11,26.99 15.11,26.03 BIKEMOTOR.1
  Bottom 0.406: v43.69,40.64 43.05,40.01 27.18,40.01 v24,36.83
GND  (via drill 0.6)
  Top 0.406: LR2.14 47.82,85.72 47.82,84.45 LR2.15 v45.59,84.45 | 47.82,69.22 47.82,70.48 LR1.14 | C17.2 36.7,47.62 38.29,47.62 U$5.8 | v42.73,46.36 42.1,46.99 42.1,47.62 U$5.2 | C18.2 41.78,52.07 46.23,47.62 46.86,47.62 U$2.4 | v54.8,48.9 54.8,47.62 U$7.4 | v52.58,77.79 52.58,76.83 LR1.8 | C21.1 52.58,96.52 52.58,92.07 LR2.8 | v49.4,69.22 47.82,69.22 | 47.82,69.22 LR1.15
  Bottom 0.406: RE2.1 4.32,100.33 8.13,100.33
  pour Bottom: 61.47,45.72 61.47,0 140.21,0 140.21,110.49 8.13,110.49 8.13,45.72
HOLE
  cutout Top: 129.22,84.03 131.76,85.3 136.84,85.3 136.84,73.87 129.22,73.87
HORN  (via drill 0.6)
  Top 0.406: v64.01,86.68 64.01,97.79 RC.1
  Bottom 0.406: v64.01,86.68 64.01,79.69 62.42,78.1 U$1.32
IMU-CS  (via drill 0.6)
  Top 0.406: v106.87,96.2 106.87,77.79 75.12,46.04 75.12,45.09 U$1.A11
  Bottom 0.406: v106.87,96.2 99.57,103.5 96.39,103.5 IMU.2
LR-EN
  Top 0.406: LR1.4 53.21,71.75 55.12,73.66 55.12,84.14 | 55.12,84.14 55.12,85.41 53.53,86.99 LR2.4 | 55.12,84.14 60.2,84.14 61.47,85.41 62.1,85.41 U$1.26
MISO  (via drill 0.6)
  Top 0.406: RS.3 88.77,99.06 90.04,100.33 95.76,100.33 IMU.3 | v92.58,89.53 92.58,73.02 U$1.MISO_ICSP
  Bottom 0.406: v92.58,89.53 92.58,90.17 89.73,93.03 89.73,97.16 88.14,98.74 RS.3
MOSI  (via drill 0.6)
  Top 0.406: RS.1 86.23,99.06 87.82,97.47 v92.9,97.47 | v91.31,89.53 91.95,88.9 91.95,85.09 88.77,81.91 88.77,72.39 90.04,71.12 90.04,70.48 U$1.MOSI_ICSP
  Bottom 0.406: IMU.1 v92.9,97.47 | v91.31,89.53 89.09,91.76 89.09,95.57 RS.1
N$1
  Top 0.406: R1.2 77.98,20 75.44,22.54 LED1.A
N$2  (via drill 0.6)
  Top 0.406: v85.92,13.65 85.92,25.08 LED2.A
  Bottom 0.406: v85.92,13.65 R2.2
N$3
  Bottom 0.406: R3.2 99.88,13.02 99.88,22.23 97.34,24.77 96.39,24.77 LED3.A
N$6
  Top 0.406: LED4.A 44.96,53.34 44.96,52.39 R19.2
N$7  (via drill 0.6)
  Top 0.406: v40.83,44.13 41.47,43.5 41.47,42.86 U$5.14 | v40.83,41.27 40.83,39.69 39.88,38.73 39.88,33.02 27.81,20.95 v25.91,20.95
  Bottom 0.406: v40.83,41.27 v40.83,44.13 | v25.91,20.95 22.42,17.46 C32.1
N$9
  Top 0.406: U$5.10 38.93,42.86 38.93,44.45 39.24,44.77 39.56,44.45 39.56,42.86 U$5.11
N$10
  Top 0.406: U$5.12 40.2,42.55 40.2,41.91 37.97,39.69 34.48,39.69 23.37,28.58 R21.2 23.37,28.26 23.37,23.49 R22.1
N$11
  Top 0.406: U$5.3 41.47,47.62 41.47,46.99 41.15,46.67 17.02,46.67 13.53,50.16 13.53,51.44 14.16,52.07 21.78,52.07 22.73,51.12 C30.1
PANIC
  Top 0.406: RC.2 62.42,101.6 60.83,100.01 60.83,99.69 58.61,97.47 58.61,87.31 59.56,86.36 59.56,85.72 U$1.27
REAR-PWM  (via drill 0.6)
  Top 0.406: v52.9,52.7 52.9,47.31 54.17,46.04 56.07,46.04 57.02,46.99 57.02,47.31 U$7.2 | v52.9,56.83 52.9,57.47 59.25,63.82 62.74,63.82 64.32,65.41 v64.32,74.29
  Bottom 0.406: v52.9,56.83 v52.9,52.7 | v64.32,74.29 95.12,74.29 114.17,93.34 U$1.8
REAR-PWM-FINAL  (via drill 0.6)
  Top 0.406: OP-AMP.1 28.13,41.59 28.77,41.59 30.35,40.01 OP-AMP.4 30.67,39.69 v30.67,38.73 | v27.81,38.73 24.32,38.73 14.8,29.21 BIKEMOTOR.3
  Bottom 0.406: v27.81,38.73 v30.67,38.73
REAR-PWMOUT  (via drill 0.6)
  Top 0.406: v30.67,37.15 28.13,39.69 OP-AMP.3 | R18.2 38.29,33.34 38.29,34.61 34.8,38.1 C15.1
  Bottom 0.406: v30.67,37.15 33.21,37.15 34.48,38.42 C15.1
REAR-PWMR/SERVO2  (via drill 0.6)
  Top 0.406: v42.1,33.97 49.09,33.97 53.21,38.1 54.48,38.1 57.02,40.64 57.02,41.59 U$7.7
  Bottom 0.406: v42.1,33.97 40.83,35.24 25.59,35.24 23.37,33.02 R18.1
REAR-TIMER  (via drill 0.6)
  Top 0.406: v42.1,35.24 47.82,35.24 49.09,36.51 49.09,37.15 50.67,38.73 54.17,38.73 55.75,40.32 55.75,41.59 U$7.6
  Bottom 0.406: v42.1,35.24 41.47,35.88 18.61,35.88 14.48,31.75 BIKEMOTOR.4
REAR-TIMER-IN  (via drill 0.6)
  Top 0.406: v56.07,49.21 56.07,47.62 U$7.3 | v63.37,51.12 v56.07,51.12 | v66.55,54.29 82.11,54.29 v93.22,65.41
  Bottom 0.406: v56.07,51.12 v56.07,49.21 | v66.55,54.29 v63.37,51.12 | v93.22,65.41 95.12,65.41 121.79,92.07 121.79,93.03 U$1.11
REG5V
  Top 0.406: 37.34,18.73 31.62,18.73 30.35,17.46 29.4,17.46 C31.1 | 37.34,18.73 38.29,17.78 C14.1 38.61,17.46 41.78,14.29 41.78,7.94 5VOUTPUT.2 | C19.1 58.29,38.73 58.29,41.59 U$7.8 58.29,41.91 58.29,42.23 57.34,43.18 52.26,43.18 50.99,41.91 U$2.8 50.67,41.91 50.67,39.69 47.82,36.83 C20.1 47.5,36.83 45.28,36.83 44.01,38.1 C16.1 | VREGULATOR.2 25.91,41.91 26.54,42.55 28.77,42.55 29.4,41.91 30.35,41.91 OP-AMP.5 30.67,41.91 33.85,41.91 37.97,46.04 41.78,46.04 43.05,44.77 43.05,43.18 42.73,42.86 U$5.16 42.73,42.55 42.73,39.37 43.69,38.42 C16.1 | 37.34,18.73 37.34,20.32 41.15,24.13 41.15,35.56 43.69,38.1 C16.1
REV
  Top 0.406: RC.3 66.55,100.33 68.45,100.33 69.09,99.69 69.09,98.42 68.77,98.11 68.77,89.22 65.28,85.72 65.28,81.6 62.74,79.06 61.79,79.06 60.83,78.1 59.88,78.1 U$1.33
RS-CS  (via drill 0.6)
  Top 0.406: v65.28,55.56 65.28,57.79 65.91,58.42 65.91,73.66 v71.95,79.69 | v84.01,94.93 84.01,96.52 83.06,97.47 83.06,99.06 RS.2
  Bottom 0.406: v65.28,55.56 62.42,52.7 U$1.52 | v71.95,79.69 84.01,91.76 v84.01,94.93
RX0  (via drill 0.6)
  Top 0.406: v84.01,97.79 85.6,97.79 90.04,93.34 92.58,93.34 U$1.RX0
  Bottom 0.406: v84.01,97.79 80.84,100.96 SPINS.1
RX2
  Top 0.406: SPINS.3 79.88,96.52 79.88,93.34 U$1.RX2
RX3  (via drill 0.6)
  Top 0.406: v94.17,94.93 94.81,94.93 97.03,97.16 98.62,97.16 99.25,97.79 105.92,97.79 GPS.2
  Bottom 0.406: v94.17,94.93 94.17,89.85 92.9,88.58 89.73,88.58 85.28,93.03 U$1.RX3
SCK  (via drill 0.6)
  Top 0.406: RS.5 92.58,99.06 93.85,97.79 98.3,97.79 IMU.5 | v101.79,96.2 101.79,79.38 92.9,70.48 U$1.SCK_ICSP
  Bottom 0.406: v101.79,96.2 99.57,98.42 IMU.5
TX0
  Top 0.406: SPINS.2 81.47,97.47 81.47,91.76 82.11,91.12 93.53,91.12 94.17,91.76 94.17,92.07 95.12,93.03 U$1.TX0
TX2
  Top 0.406: U$1.TX2 82.42,93.34 82.42,101.6 81.15,102.87 75.12,102.87 73.22,100.96 SPINS.4
TX3  (via drill 0.6)
  Top 0.406: v89.41,90.17 90.68,90.17 91,90.49 97.98,90.49 99.25,91.76 99.25,94.93 101.47,97.16 107.82,97.16 GPS.3
  Bottom 0.406: v89.41,90.17 87.82,91.76 87.82,93.03 U$1.TX3